# Altium PCB Encoder_v1.PcbDoc
Units mm, origin at the board's own origin, x right, y up, seen from the top; angles counter-clockwise.
Board outline 54 x 36 mm, 2 copper layers (Top Layer, Bottom Layer), stack 1.57 mm thick; 24 components, 32 nets, 128 pads, 67 vias.
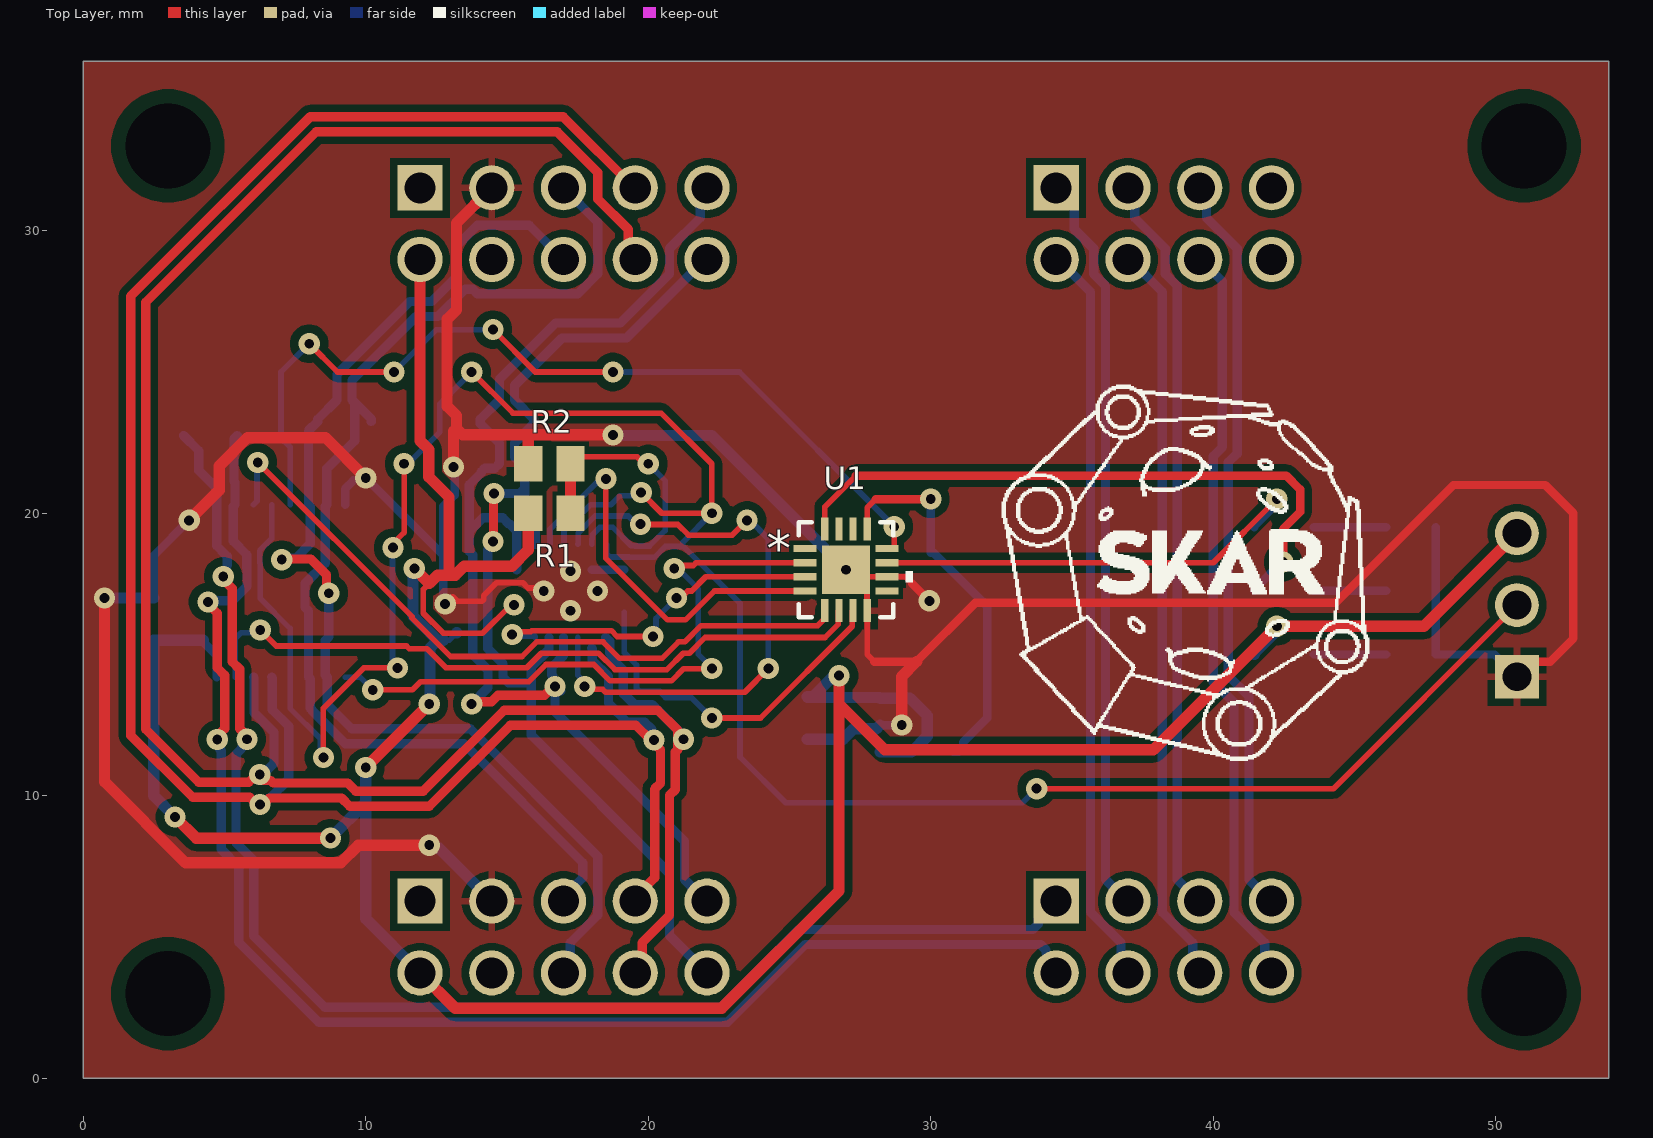
[diagram p0: Top Layer view]
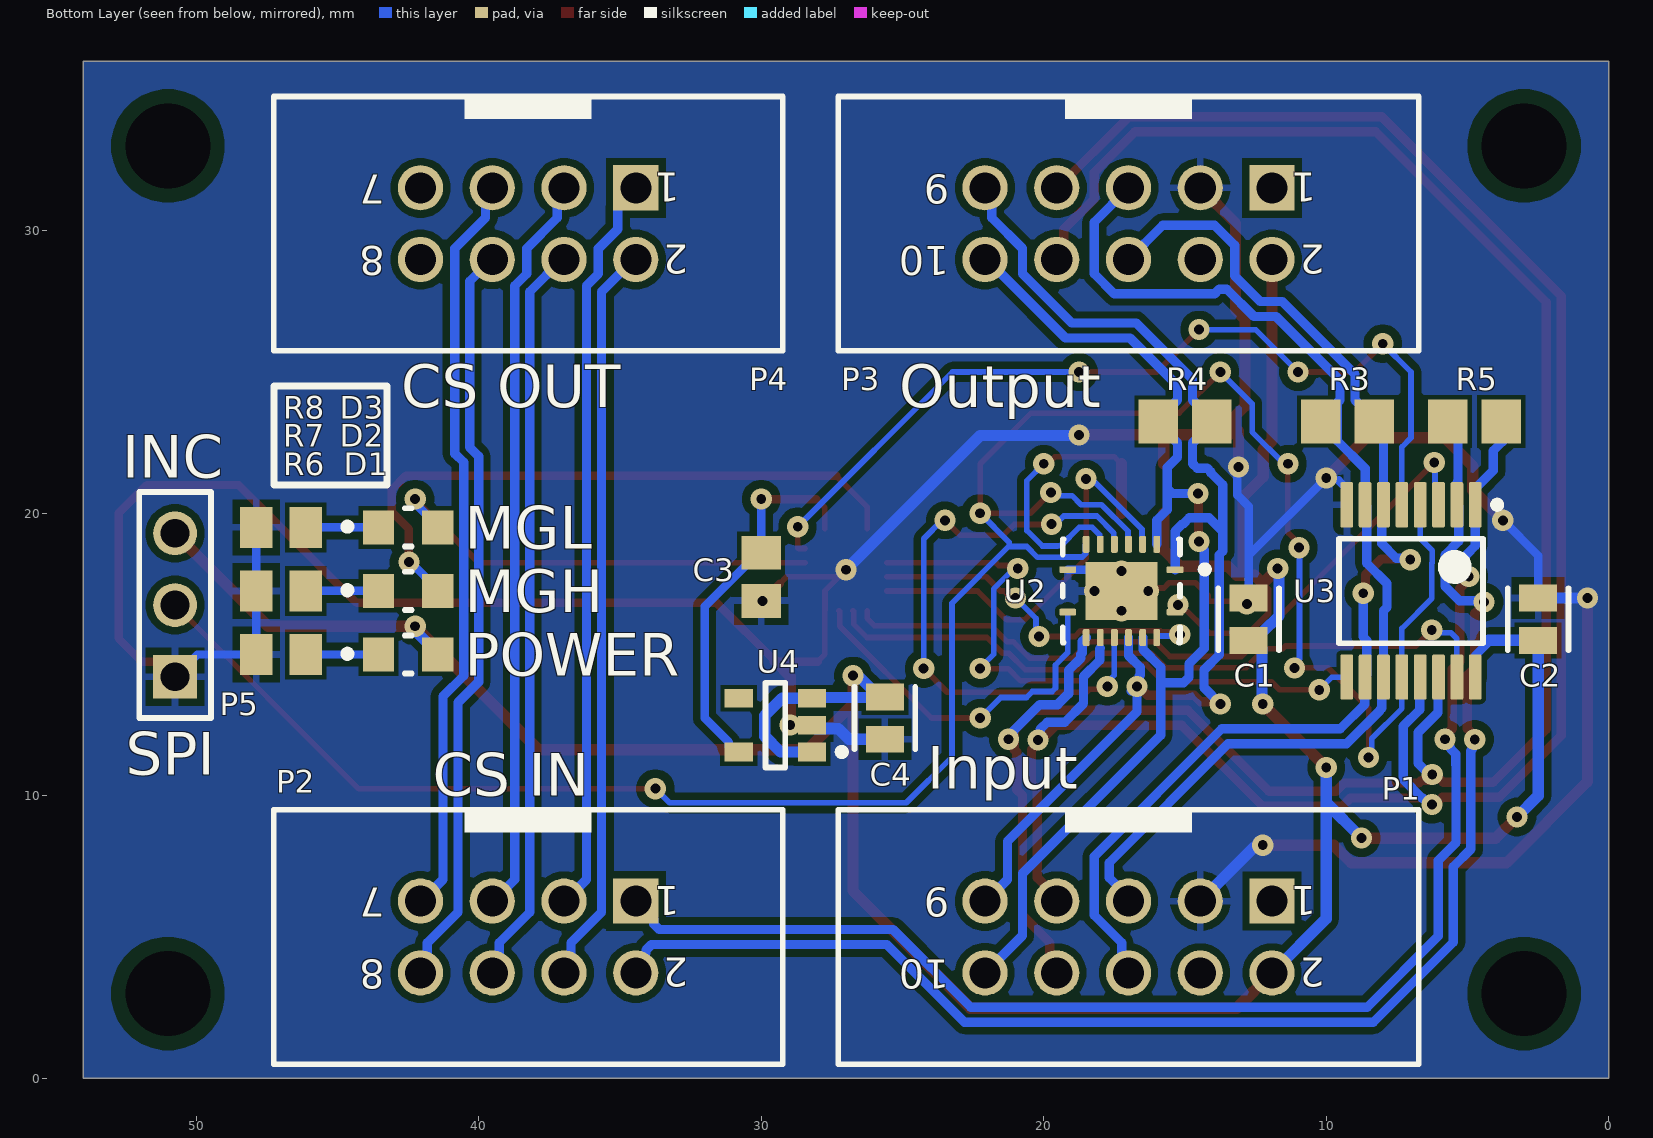
[diagram p1: Bottom Layer view, seen from below]
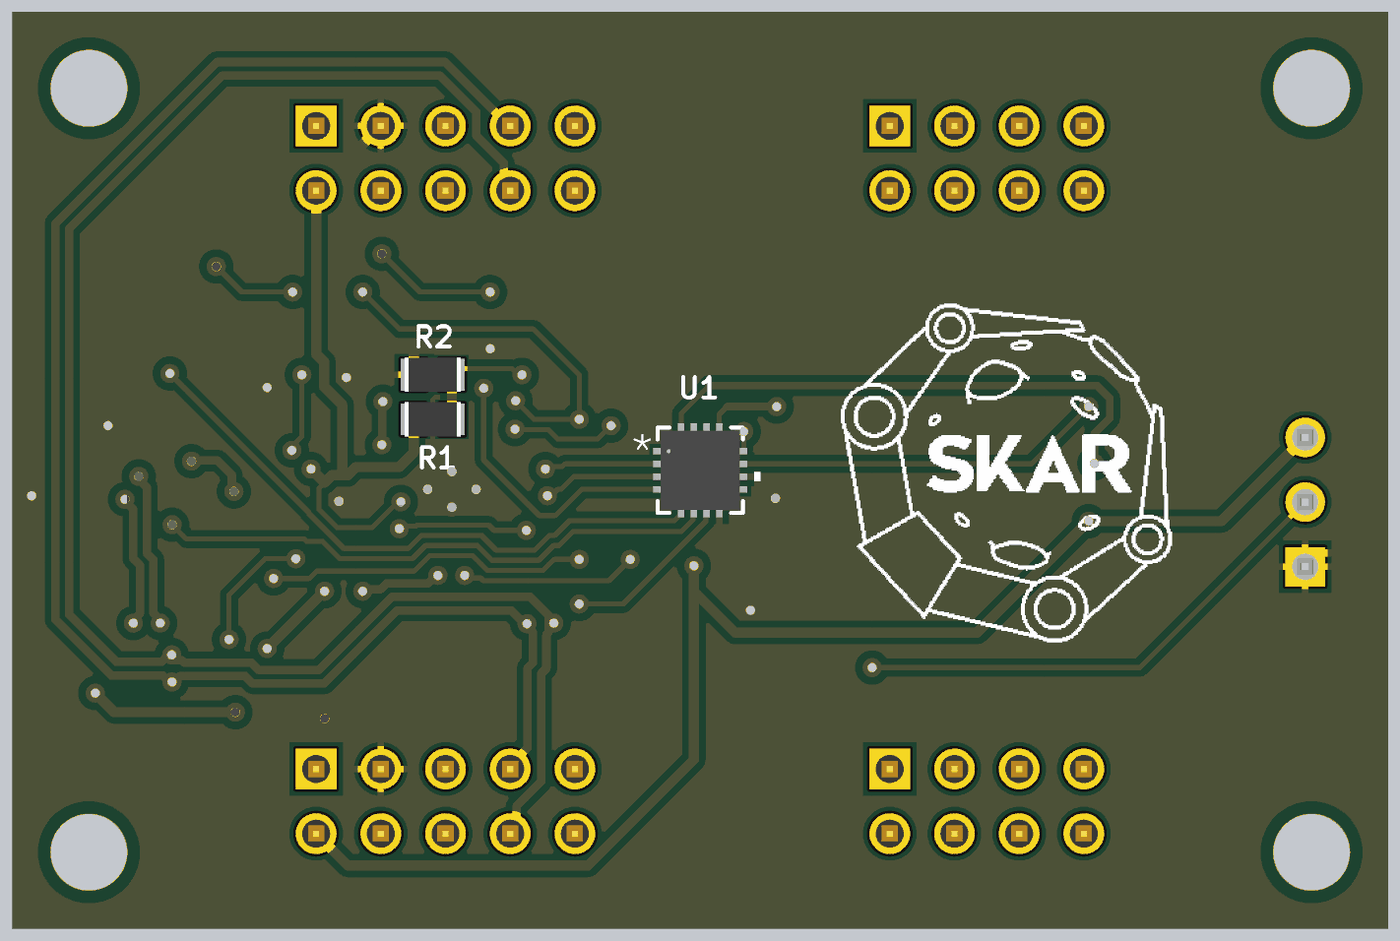
[diagram p2: 3D render of the assembled board from above, using the file's embedded part models]
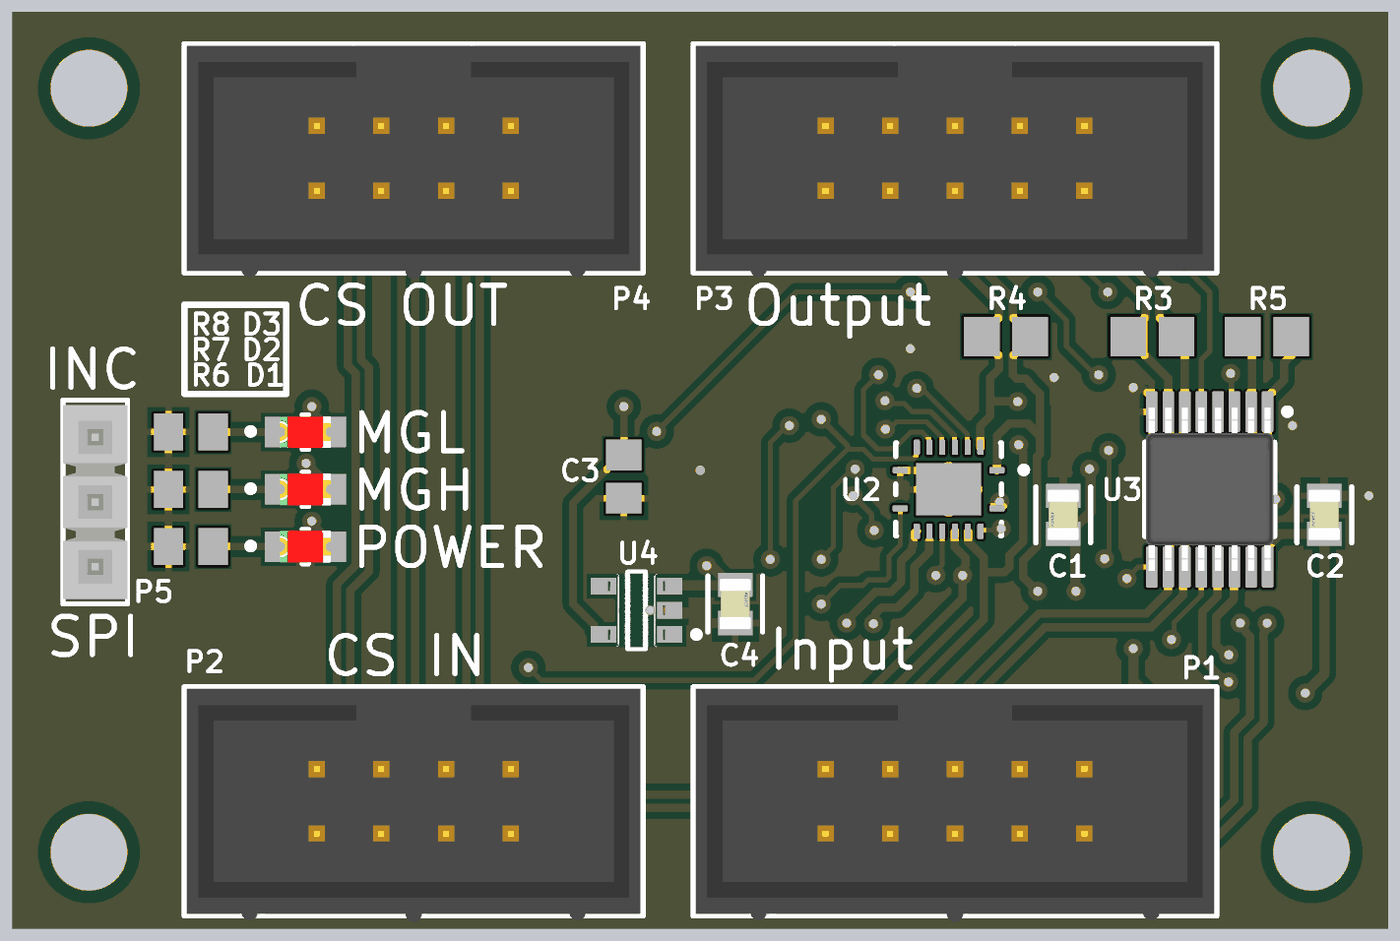
[diagram p3: 3D render of the assembled board from below, using the file's embedded part models]

## Layer stack, top to bottom
Top Solder: solder mask 0.01, Solder Resist, Dk 3.5
Top Layer: signal copper 0.035
Dielectric 1: dielectric 1.5, FR-4, Dk 4.5
Bottom Layer: signal copper 0.035
Bottom Solder: solder mask 0.01, Solder Resist, Dk 3.5

## Board outline
0,0 0,36 54,36 54,0

## Design rules (kind name [scope] priority, off if disabled: settings)
Clearance [All] p1: gap=0.254 ignorepadtopadclearanceinfootprint=FALSE except(0.15: SMDPad-SMDPad SMDPad-THPad SMDPad-Via SMDPad-Fill SMDPad-Poly SMDPad-Region SMDPad-Text; 0.2: Arc-Arc Arc-Track Arc-SMDPad Arc-THPad Track-Track Track-SMDPad Track-THPad; 0.5: Arc-Hole Track-Hole SMDPad-Hole THPad-Hole Via-Hole Fill-Hole Poly-Hole Region-Hole Text-Hole)
ComponentClearance [All] p1: gap=0.1 collisioncheckmode=3 verticalgap=0.1 showdistances=FALSE
DiffPairsRouting [All] p1: maxlimit=0.254 minlimit=0.2 mostfreqgap=0.2 toplayer_minwidth=0.33 toplayer_maxwidth=0.33 toplayer_prefwidth=0.33 bottomlayer_minwidth=0.33 bottomlayer_maxwidth=0.33 bottomlayer_prefwidth=0.33 maxuncoupledlength=12.7
HoleSize [All] p1: absolutevalues=TRUE maxlimit=4 minlimit=0.025 maxpercent=80.000 minpercent=20.000
MinimumSolderMaskSliver [All] p1: minsoldermaskwidth=0.2
PolygonConnect [All] p1: thpad.connectstyle=Relief thpad.reliefconductorwidth=0.254 thpad.reliefentries=4 thpad.polygonreliefangle="90 Angle" thpad.airgapwidth=0.254 smdpad.connectstyle=Relief smdpad.reliefconductorwidth=0.254 smdpad.reliefentries=4 smdpad.polygonreliefangle="90 Angle" smdpad.airgapwidth=0.254 via.connectstyle=Direct via.reliefconductorwidth=0.254 via.reliefentries=4 via.polygonreliefangle="90 Angle" via.airgapwidth=0.254
RoutingVias [All] p1: holewidth=0.35 width=0.75 viastyle="Through Hole" minholewidth=0.2 minwidth=0.5 maxholewidth=0.7 maxwidth=1
SMDNeckDown [All] p1: percent=90.000
SilkToSilkClearance [All] p1: silktosilkclearance=0.2
SilkToSolderMaskClearance [IsPad] p1: minsilkscreentomaskgap=0.2 clearancetoexposedcopper=TRUE
SolderMaskExpansion [All] p1: expansion=0.102 istentingtop=FALSE useseparateexpansions=TRUE expansionbottom=0.102 istentingbottom=FALSE
Width [All] p1: maxlimit=0.4 minlimit=0.2 preferedwidth=0.3
Width Width_Differential [InNetClass('SIGNAL')] p2: maxlimit=0.381 minlimit=0.135 preferedwidth=0.331 impedanceprofiledriven=TRUE impedanceprofileid={12B866CA-FE4E-4F91-8C1C-2824152DAA23} impedanceprofilevalue=120.000000 minimp=50.000000 maximp=50.000000 favimp=50.000000
Width Width_Power [InNetClass('POWER')] p3: maxlimit=1 minlimit=0.25 preferedwidth=0.5
24 further rules are at their usual default settings.

## Classes and differential pairs
differential pair CS3: +CS3_P -CS3_N
differential pair CS2: +CS2_P -CS2_N
differential pair CS1: +CS1_P -CS1_N
differential pair Z/MOSI: +Z/MOSI_P -Z/MOSI_N
differential pair CS: +CS_P -CS_N
differential pair B/MISO: +B/MISO_P -B/MISO_N
differential pair A/SCLK: +A/SCLK_P -A/SCLK_N

## Components (designator, comment, footprint, x,y, rotation, side; value= is the part's Value field where it differs from the comment)
C1 "C0805C104K5RACTU" FP-C0805C-DN-MFG 12.75,16.25 r90 bottom value="0.10 μF"
C2 "C0805C104K5RACTU" FP-C0805C-DN-MFG 2.5,16.25 r90 bottom value="0.10 μF"
C3 "GRM216R61E105KA12D" CAPC2013X70X45NL10T25 30,17.75 r90 bottom
C4 "C0805C104K5RACTU" FP-C0805C-DN-MFG 25.625,12.75 r270 bottom value="0.10 μF"
D1 "150080SS75000" FP-150080SS75000-MFG 42.5,15 r180 bottom
D2 "150080SS75000" FP-150080SS75000-MFG 42.5,17.25 r180 bottom
D3 "150080SS75000" FP-150080SS75000-MFG 42.5,19.5 r180 bottom
P1 "61201021621" 61201021621 17,5 r0 bottom
P2 "61200821621" 61200821621 38.25,5 r0 bottom
P3 "61201021621" 61201021621 17,30.25 r0 bottom
P4 "61200821621" 61200821621 38.25,30.25 r0 bottom
P5 "TSW-103-07-T-S" SMTC-TSW-103-07-X-S 50.75,14.21 r90 bottom
R1 "ERA-6AEB103V" RESC2013X60X40LL20T25_A 16.5,20 r180 top
R2 "ERA-6AEB103V" RESC2013X60X40LL20T25_A 16.5,21.75 r0 top
R3 "ERA6AEB121V" RESC2013X60X40ML20T25 9.25,23.25 r180 bottom
R4 "ERA6AEB121V" RESC2013X60X40ML20T25 15,23.25 r0 bottom
R5 "ERA6AEB121V" RESC2013X60X40ML20T25 4.75,23.25 r0 bottom
R6 "ERJ-6ENF4701V" RESC2013X70X40NL20T20 47,15 r0 bottom
R7 "ERJ-6ENF4701V" RESC2013X70X40NL20T20 47,17.25 r0 bottom
R8 "ERJ-6ENF4701V" RESC2013X70X40NL20T20 47,19.5 r0 bottom
U1 "MA732GQ-Z" QFN-16_MA732 27,18 r0 top locked
U2 "SN65C1168ERGYR" RGY0016A_V 17.25,17.25 r270 bottom locked
U3 "SN65C1167EPWR" PW0016A_M 7,17.25 r270 bottom
U4 "MIC5504-3.3YM5-TR" FP-SOT23-5LD-PL-1-MFG 29.5,12.5 r0 bottom

## Footprints (in the part's own frame and the unit in brackets; to place one, negate y for a bottom-side part, rotate by r counter-clockwise, add the part's x,y. Pads: shape width x height; smd on the part's side, far side on the other; paste and mask are expansions set on the pad)
61200821621 [mm] "8 pins, straight, gold plating"
  rect 1.6x1.6 hole 1.1: 1(-3.81,-1.27)
  round 1.6 hole 1.1: 2(-3.81,1.27) 3(-1.27,-1.27) 4(-1.27,1.27) 5(1.27,-1.27) 6(1.27,1.27) 7(3.81,-1.27) 8(3.81,1.27)
  silkscreen extent -9.01,-4.5 9.01,4.5, body extent -8.91,-4.42 8.91,4.75, height 9.13
61201021621 [mm] "10 pins, straight, gold plating"
  rect 1.6x1.6 hole 1.1: 1(-5.08,-1.27)
  round 1.6 hole 1.1: 2(-5.08,1.27) 3(-2.54,-1.27) 4(-2.54,1.27) 5(0,-1.27) 6(0,1.27) 7(2.54,-1.27) 8(2.54,1.27) 9(5.08,-1.27) 10(5.08,1.27)
  silkscreen extent -10.28,-4.5 10.28,4.5, body extent -10.18,-4.42 10.18,4.75, height 9.13
CAPC2013X70X45NL10T25 [mm] "Chip Capacitor, 2-Leads, Body 2.00x1.25mm, IPC Medium Density"
  rect 1.2x1.4 smd: 1(-0.85,0) 2(0.85,0)
  body extent -1.05,-0.67 1.05,0.67, height 0.7
FP-150080SS75000-MFG [mm]
  rect 1.1x1.2 smd paste+0 mask+0: 1(-1.05,0) 2(1.05,0)
  silkscreen extent -2.28,-0.67 0.13,0.67, body extent -1,-0.63 1,0.63, height 0.8
FP-C0805C-DN-MFG [mm]
  rect 0.95x1.35 smd paste+0 mask+0: 1(-0.75,0) 2(0.75,0)
  silkscreen extent -1.1,-1.07 1.1,1.07, body extent -1,-0.63 1,0.63, height 0.88
FP-SOT23-5LD-PL-1-MFG [mm]
  rect 1x0.66 smd paste+0 mask+0: 1(-1.3,0.95) 2(-1.3,0) 3(-1.3,-0.95) 4(1.3,-0.95) 5(1.3,0.95)
  silkscreen extent -2.47,-1.5 0.35,1.5, body extent -1.4,-1.45 1.4,1.45, height 1.45
PW0016A_M [mm] "SOP, 16-Leads, Body 5.1x4.5mm, Pitch 0.65mm, IPC Low Density"
  rrect22% 1.6x0.45 smd: 1(-3.05,2.275) 2(-3.05,1.625) 3(-3.05,0.975) 4(-3.05,0.325) 5(-3.05,-0.325) 6(-3.05,-0.975) 7(-3.05,-1.625) 8(-3.05,-2.275) 9(3.05,-2.275) 10(3.05,-1.625) 11(3.05,-0.975) 12(3.05,-0.325) 13(3.05,0.325) 14(3.05,0.975) 15(3.05,1.625) 16(3.05,2.275)
  silkscreen extent -3.17,-2.55 1.85,3.17, body extent -3.21,-2.5 3.21,2.5, height 1
QFN-16_MA732 [mil]
  rect 32x10 smd paste+0 mask+0: 1(-57,29.53) 2(-57,9.84) 3(-57,-9.84) 4(-57,-29.53) 9(57,-29.53) 10(57,-9.84) 11(57,9.84) 12(57,29.53)
  rect 10x32 smd paste+0 mask+0: 5(-29.53,-57) 6(-9.84,-57) 7(9.84,-57) 8(29.53,-57) 13(29.53,57) 14(9.84,57) 15(-9.84,57) 16(-29.53,57)
  rect 67x67 smd paste+0 mask+0: 17(0,0)
  silkscreen extent -66,-66 93,66, body extent -61,-61 61,61, height 37
RESC2013X60X40LL20T25_A [mm] "Chip Resistor, 2-Leads, Body 2.20x1.35mm, IPC High Density"
  rect 1x1.25 smd: 1(-0.75,0) 2(0.75,0)
  body extent -1.1,-0.67 1.1,0.67, height 0.6
RESC2013X60X40ML20T25 [mm] "Chip Resistor, 2-Leads, Body 2.00x1.25mm, IPC Low Density"
  rect 1.4x1.55 smd: 1(-0.95,0) 2(0.95,0)
  body extent -1.1,-0.72 1.1,0.72, height 0.6
RESC2013X70X40NL20T20 [mm] "Chip Resistor, 2-Leads, Body 2.2x1.35mm, IPC Medium Density"
  rect 1.15x1.45 smd: 1(-0.875,0) 2(0.875,0)
  body extent -1.1,-0.72 1.1,0.72, height 0.7
RGY0016A_V [mm] "QFN, 16-Leads, Body 4x3.5mm, Thermal Pad 2.55x2.05mm, TI Recommend"
  rrect42% 0.24x0.6 smd: 1(-0.75,1.9) 8(-0.75,-1.9) 9(0.75,-1.9) 16(0.75,1.9)
  rrect42% 0.6x0.24 smd: 2(-1.65,1.25) 3(-1.65,0.75) 4(-1.65,0.25) 5(-1.65,-0.25) 6(-1.65,-0.75) 7(-1.65,-1.25) 10(1.65,-1.25) 11(1.65,-0.75) 12(1.65,-0.25) 13(1.65,0.25) 14(1.65,0.75) 15(1.65,1.25)
  rect 2.05x2.55 smd: 17(0,0)
  silkscreen extent -1.83,-2.07 1.83,3.07, body extent -1.75,-2 1.75,2, height 1
SMTC-TSW-103-07-X-S [mm] ".025 SQ Post Terminal Strip Assembly, 1x3 Pins, Vertical, 2.54mm Pitch, Male"
  rect 1.55x1.55 hole 1.02: 1(0,0)
  round 1.55 hole 1.02: 2(2.54,0) 3(5.08,0)
  silkscreen extent -1.46,-1.27 6.54,1.27, body extent -1.27,-1.27 6.35,1.27, height 8.38

## Part data
C1 C2 C4: library part CMP-2007-00279-2, "CAP CER 0.1UF 50V X7R 0805", Capacitance="0.10 μF", Manufacturer=KEMET, Package=C0805C-DN, Temperature="-55°C to +125°C", Temperature Characteristic=X7R, Temperature Coefficient=30ppm/°C, Temperature Range High=+125°C, Temperature Range Low=-55°C, Tolerance=0.1, Voltage Rating="50 V", Automotive=No, Category=Cap, ComponentLink2Description=Datasheet, ComponentLink2URL=https://content.kemet.com/datasheets/KEM_C1003_C0G_SMD.pdf, Device Class L1="Passive Components", Device Class L2=Capacitors, Device Class L3="Ceramic Capacitors", Digikey Description="CAP CER 0.1UF 50V X7R 0805", Height=0.88mm, Ipc Land Pattern Name=CAPC200125X78, Lead Free=Yes, Manufacturer Part Number=C0805C104K5RACTU, Material=Ceramic, Mouser Description="Cap Ceramic 0.1uF 50V X7R 10% SMD 2.0 x 1.2 mm 125 C Paper T/R", Octopart=https://octopart.com/c0805c104k5ractu-kemet-143926, RoHS=TRUE
C3: library part CMP-2007-00957-1, Manufacturer=Murata, Part Number=GRM216R61E105KA12D
D1 D2 D3: library part CMP-1426-00010-2, "LED RED CLEAR 0805 SMD", Case Code (Imperial)=0805, Case Code (Metric)=2012, Color=Red, Forward Current=30mA, Forward Voltage=1.9V, Lens Color=Colorless, Max Operating Temperature=85°C, Min Operating Temperature=-40°C, Package Quantity=1, Test Current=20mA, Case/Package=0805, Dominant Wavelength=630nm, Height=0.8mm, Length=2mm, Lens Size=1.25mm, Lens Style=Clear, Lens Transparency=Clear, Luminous Intensity=60mcd, Mount="Surface Mount", Packaging="Cut Tape", RoHS Compliant=Yes, Series=WL-SMCW, Viewing Angle=140°, Wavelength=630nm, Width=1.25mm
P1 P3: library part CMP-1502-00007-1, "Male Box Header WR-BHD, THT, Vertical, pitch 2.54 mm, 10 pins", Contact Resistance=20mOhm, Manufacturer="Wurth Elektronik", Operating Temperature=-40to125degC, Withstanding Voltage=500VAC, Working Voltage=250VAC, Datasheet URL=https://katalog.we-online.de/em/datasheet/6120xx21621.pdf, Gender=Male, Manufacturer URL=http://www.we-online.de, Mounting Technology=THT, Orientation=Vertical, Package Reference=61201021621, Packaging=Tray, Part Number=61201021621, Pin Number=10, Pitch=2.54mm, Published Date=August2018, Publisher=WurthElektronik
P2 P4: library part CMP-1502-00006-1, "Male Box Header WR-BHD, THT, Vertical, pitch 2.54 mm, 8 pins", Contact Resistance=20mOhm, Manufacturer="Wurth Elektronik", Operating Temperature=-40to125degC, Withstanding Voltage=500VAC, Working Voltage=250VAC, Datasheet URL=https://katalog.we-online.de/em/datasheet/6120xx21621.pdf, Gender=Male, Manufacturer URL=http://www.we-online.de, Mounting Technology=THT, Orientation=Vertical, Package Reference=61200821621, Packaging=Tray, Part Number=61200821621, Pin Number=8, Pitch=2.54mm, Published Date=August2018, Publisher=WurthElektronik
P5: library part CMP-1024-00332-1, "0.025\" SQ Post Header, Through-hole, Vertical, -55 to 105 degC, 2.54 mm Pitch, 3-Pin, Male, RoHS", Manufacturer=Samtec, Temperature Range="-55 to 105 degC", ComponentLink1Description="Manufacturer URL", ComponentLink1URL=http://www.samtec.com, ComponentLink2Description=Datasheet, ComponentLink2URL=http://www.samtec.com/documents/webfiles/pdf/TSW_TH.PDF, ComponentLink3Description="Package Specification", ComponentLink3URL=http://www.samtec.com/documents/webfiles/cpdf/TSW-XXX-XX-XXX-X-XX-XXX-MKT.pdf, DatasheetVersion=F-214, Mounting Technology=Through-hole, Orientation=Vertical, PackageDescription=".025[0.64] SQ. Post Terminal Strip Assembly", PackageReference=TSW-103-07-X-S, PackageVersion="DM, 8/1988", PartNumber=TSW-103-07-T-S, Pitch="2.54 mm", RoHS=True
R1 R2: library part CMP-2001-00582-2, "Metal Film Chip Resistor, High Reliability Type, 0.125 W, +/- 0.1%, -55 to 155 degC, 0805 (2012 Metric), RoHS, Tape and Reel", Case Code - in=0805, Case Code - mm=2012, Manufacturer=Panasonic, Operating Temperature Range=-55Cto+155C, Package / Case=0805(2012metric), Package Description="2-Pin Surface Mount Device, Body 2 x 1.25 mm", Power Rating=125mW(1/8W), Resistance=10kOhms, Temperature Coefficient=25PPM/C, Tolerance=0.1%, Voltage Rating=100V, Brand=Panasonic, Datasheet URL=https://industrial.panasonic.com/cdbs/www-data/pdf/RDM0000/AOA0000C307.pdf, Datasheet Version=02/2016, Factory Pack Quantity=5000, Height=0.5mm, Length=2mm, Manufacturer URL=http://www.panasonic.com/, Mounting Technology=SurfaceMount, Package Reference=0805, Packaging=Reel, Product=ThinFilmResistorsSMD, Product Category=ThinFilmResistors-SMD, RoHS=Details, Series=ERA-6A, Termination Style=SMD/SMT, Type=MetalFilmChipResistors, Width=1.25mm
R3 R4 R5: library part CMP-2001-00588-1, Manufacturer=Panasonic, Part Number=ERA6AEB121V
R6 R7 R8: library part CMP-2001-00550-5, "Chip Resistor, 4.7 KOhm, +/- 1%, 0.125 W, -55 to 155 degC, 0805 (2012 Metric), RoHS, Tape and Reel", Manufacturer=Panasonic, Max Operating Temperature="155 degC", Min Operating Temperature="-55 degC", Package Quantity=5000, Voltage Rating="150 V", ComponentLink1Description="Manufacturer URL", ComponentLink1URL=http://www.panasonic.com/, ComponentLink2Description=Datasheet, ComponentLink2URL=http://industrial.panasonic.com/cdbs/www-data/pdf/RDA0000/AOA0000C86.pdf, DatasheetVersion=04/2015, Height="0.6 mm", Length="2 mm", Mount="Surface Mount", Mounting Technology="Surface Mount", PackageDescription="2-Pin Surface Mount Device, Body 2 x 1.25 mm", PackageReference=0805, Packaging="Tape and Reel", Pins=2, REACH SVHC=Yes, RoHSCompliant=true
U1: "No Description Available", Mfr_Name="Monolithic Power Systems", Copyright="Copyright (C) 2023 Ultra Librarian. All rights reserved.", Manufacturer_Part_Number=MA732GQ-Z, RefDes=RefDes, Type=DEV
U2: library part CMP-0310-00131-3, "None", Case/Package="VQFN EP", Max Operating Temperature=85°C, Max Supply Voltage=5.5V, Min Operating Temperature=-40°C, Min Supply Voltage=4.5V, Nominal Supply Current=9mA, Operating Supply Voltage=5V, Output Current=20uA, Output Voltage=3.5V, Package Quantity=1, Data Rate=10Mbps, Lead Free="Lead Free", Logic Function=Transceiver, Number of Drivers=2, Number of Pins=16, Number of Receivers=2, Number of Transceivers=1, Number of Transmitters=2, Operating Supply Current=9mA, Packaging="Tape and Reel", Propagation Delay=8ns, Radiation Hardening=No, RoHS Compliant=Yes, Series=-, Supply Current=9mA, Weight=0.001312oz
U3: library part CMP-0310-00539-2, "Dual Differential Driver and Receiver with +/-15-kV IEC ESD Protection, 2 TX / 2 RX, 5V, -40 to 85 degC, 16-Pin TSSOP(PW), Green (RoHS & no Sb/Br)", Drivers Per Package=2, Manufacturer="Texas Instruments", Rating=Catalog, Supply Voltage(s)(V)=5, # of TX/RX="2 TX / 2 RX", Code_JEDEC=MO-153, ComponentLink1Description=Datasheet, ComponentLink1URL=http://www.ti.com/general/docs/lit/getliterature.tsp?genericPartNumber=SN65C1167E&fileType=pdf, ComponentLink2Description="Package Specification", ComponentLink2URL=http://www.ti.com/lit/ml/mpds361/mpds361.pdf, DatasheetVersion=SLLS740A, Eco-Plan="Green (RoHS & no Sb/Br)", ESD(kV)=15, ICC(Max)(mA)=9, Mounting Technology="Surface Mount", PackageDescription="16-Pin Plastic Thin Small Outline Package 5 x 4.4 mm Body ,0.65 mm Pitch", PackageReference=PW0016A, PackageVersion="revG, Feb-2011", PartNumber=SN65C1167EPWR, Receivers Per Package=2, SubFamily=RS-422
U4: library part CMP-2000-07604-2, "IC REG LINEAR 3.3V 300MA SOT23-5", Case/Package=SOT-23-5, Dropout Voltage=380mV, Max Input Voltage=5.5V, Max Operating Temperature=125°C, Max Output Current=300mA, Min Input Voltage=2.5V, Min Operating Temperature=-40°C, Nominal Output Voltage=3.3V, Operating Supply Current=42uA, Power Supply Rejection Ratio (PSRR)=60dB, Quiescent Current=38uA, Accuracy=3%, Height=1.1mm, Length=2.9mm, Mount="Surface Mount", Number of Outputs=1, Number of Pins=5, Output Current=300mA, Output Type=Fixed, Output Voltage=3.3V, Packaging="Tape and Reel", REACH SVHC="No SVHC", Width=1.6mm

## Free pads (board coordinates)
  round 0 hole 3: 2(51,33) 3(3,33) 4(51,3) 5(3,3)

## Via types
v1: diameter 0.75, hole 0.35, Top Layer to Bottom Layer, tented both sides, 63 vias
v2: diameter 0.75, hole 0.35, Top Layer to Bottom Layer, tented top, 4 vias

## Nets (pads, with @x,y where several pads share a name; then routed paths per layer and width w, separated by ;. In a path a pad name is that pad's centre, name@x,y a point inside that pad or via, vN(x,y) a via of type N, cw(c..) or ccw(c..) an arc to the next point about the centre after c; other vN are vias at no path point)
+3.3: C3.2 U1.13 U4.5 | length 13.6
  Top Layer w0.2: U1.13 27.75,20.199 28.051,20.5
  Top Layer w0.3: 28.051,20.5 v1(30,20.5)
  Bottom Layer w0.3: v1(30,20.5) C3.2 30.1,18.6 32,16.7 32,12.75 31.15,11.9 31.15,11.73 30.97,11.55 U4.5
+5: C1.1 C2.1 C4.1 D1.2 P1.2 P3.2 P5.3 R1.2 U2.16 U3.16 U4.1 U4.3 | length 120.3
  Top Layer w0.2: 12.25,17.519 12.037,17.306 12.037,16.462 12.749,15.75 14.133,15.75 15.141,16.758 v1(15.25,16.758)
  Top Layer w0.4: v1(3.25,9.25) 4,8.5 v1(8.75,8.5) ; v1(10,11) v1(12.25,13.25) ; v1(11.72,18.049) 12.25,17.519 12.538,17.806 12.944,17.806 ; P1.2@11.92,3.73 13.17,2.48 22.598,2.48 26.75,6.632 26.75,13.25 ; P3.2 11.92,22.567 12.233,22.254 12.233,21.28 12.944,20.569 12.944,17.806 ; R1.2 15.75,18.697 15.179,18.126 14.863,18.126 13.483,18.125 13.164,17.806 12.944,17.806 ; v1(26.75,14.25) 26.75,13.25 ; P5.3 47.46,16 v1(42.25,16) 37.875,11.625 28.375,11.625 26.75,13.25
  Bottom Layer w0.2: C1.1@12.95,15.5 C1.1@13.225,15.775 ; v1@15.208,16.717 15.208,16.642 U2.16 15.25,16.6 v1(15.25,16.758)
  Bottom Layer w0.3: 4.25,15.5 4.25,15.442 4.725,14.967 U3.16
  Bottom Layer w0.4: v1(3.25,9.25) 2.5,10 C2.1 4.25,15.5 ; v1(8.75,8.5) 10,9.75 ; v1(10,11) 10,9.75 ; v1(11.72,18.049) 11.675,18.004 11.675,16.359 11.958,16.076 11.974,16.076 C1.1@12.55,15.5 ; P1.2@11.92,3.73 10,5.65 10,9.75 ; v1(12.25,13.25) 12.275,13.275 12.275,15.225 C1.1@12.55,15.5 ; C1.1 C1.1@12.55,15.5 ; v1(26.75,14.25) 26.683,14.183 26.508,14.183 25.825,13.5 C4.1 25.65,13.475 28.175,13.475 U4.3 29.261,13.45 29.875,12.836 29.875,12.108 29.317,11.55 U4.1 ; D1.2 41.45,15.05 42.183,15.783 42.183,15.933 v1(42.25,16)
A/SCLK_N: P1.5 P3.5 R3.1 U3.7 U3.11 | length 40.9
  Bottom Layer w0.33: R3.1 10.2,23.325 R3.1@9.607,23.918 ; P1.5@17,6.27 17,6.413 17.685,7.098 17.685,7.633 13.477,11.84 9.281,11.84 8.102,13.019 8.102,13.027 8.035,13.094 8.035,14.14 U3.11 7.975,16.552 7.851,16.675 7.851,17.515 8.565,18.229 8.565,19.378 8.565,20.24 U3.7 8.625,21.584 9.607,22.566 R3.1@9.607,23.918 ; P3.5 18.215,30.305 18.215,28.477 17.503,27.765 13.957,27.765 13.794,27.928 13.52,27.928 12.557,26.965 11.777,26.965 9.515,24.703 9.515,24.01 R3.1@9.607,23.918
A/SCLK_P: P1.6 P3.6 R3.2 U3.6 U3.10 | length 41.9
  Top Layer w0.33: v1(7.027,18.356) 7.033,18.363 7.345,18.363 7.362,18.38 8.058,18.38 8.611,17.827 8.611,17.247 v1(8.691,17.167)
  Bottom Layer w0.33: v1(7.027,18.356) 7.081,18.41 7.519,18.41 8.035,18.926 8.035,20.24 U3.6 7.975,22.925 R3.2 ; R3.2@8.3,23.325 8.985,24.01 8.985,24.923 11.557,27.495 12.338,27.495 13.245,28.403 13.245,29.483 13.957,30.195 15.785,30.195 P3.6 ; v1(8.691,17.167) 8.691,15.623 8.565,15.497 8.565,15.122 8.565,14.26 8.632,14.193 8.632,13.239 9.5,12.37 13.697,12.37 18.215,7.852 18.215,5.767 17.243,4.795 17.243,3.973 P1.6@17,3.73
B/MISO_N: P1.7 P3.7 U2.11 U3.13 | length 74.2
  Top Layer w0.33: v1(6.262,9.688) 6.149,9.688 5.892,9.945 3.873,9.945 1.686,12.131 1.686,27.686 8.03,34.03 16.994,34.03 19.504,31.52 P3.7 ; v1@6.364,9.7 6.583,9.92 9.142,9.92 9.432,9.63 12.25,9.63 15.12,12.5 19.562,12.5 20.086,11.976 v1(20.2,11.976) 20.2,11.862 20.431,11.631 20.431,10.442 20.225,10.235 20.225,7.098 19.54,6.413 P1.7@19.54,6.27
  Bottom Layer w0.33: v1(6.262,9.688) 6.351,9.688 6.573,9.91 6.598,9.91 7.28,10.592 7.28,12.458 6.692,13.046 6.692,14.183 U3.13 ; 18,15.223 18.015,15.208 18.015,14.793 18.59,14.218 18.59,13.269 19.253,12.606 19.873,12.606 20.12,12.36 20.12,12.056 v1(20.2,11.976) ; P3.7@19.401,31.52 P3.7
B/MISO_P: P1.8 P3.8 U2.10 U3.14 | length 78.1
  Top Layer w0.33: v1(6.25,10.75) 6.136,10.75 5.861,10.475 4.092,10.475 2.216,12.351 2.216,27.466 8.25,33.5 16.774,33.5 18.215,32.059 18.215,31.126 19.297,30.045 19.297,29.223 P3.8 ; v1@6.26,10.54 6.641,10.54 6.731,10.45 9.362,10.45 9.652,10.16 12.03,10.16 14.9,13.03 20.333,13.03 21.04,12.324 v1@21.04,12 ; P1.8@19.54,3.73 19.783,3.973 19.783,4.795 20.755,5.767 20.755,10.016 20.962,10.222 20.962,11.549 21.04,11.628 v1@21.04,12 ; v1(21.25,12) v1@21.04,12
  Bottom Layer w0.33: U3.14 6.042,14.183 6.042,12.946 6.75,12.238 6.75,11.153 6.347,10.75 v1(6.25,10.75) ; U2.10 18.635,15.465 18.635,15.05 18.685,15 18.685,14.873 19.12,14.438 19.12,13.616 19.51,13.226 20.138,13.226 21.04,12.324 21.25,12.114 v1(21.25,12) ; P3.8@19.297,29.223 P3.8
CS1_N: P2.3 P4.1 | length 26.3
  Bottom Layer w0.33: P4.1 35.075,30.885 35.075,30.063 35.765,29.373 35.765,28.477 36.185,28.056 36.185,7.034 36.949,6.27 P2.3@36.98,6.27
CS1_P: P2.4 P4.2 | length 26.3
  Bottom Layer w0.33: P4.2 34.512,28.98 35.655,27.837 35.655,5.876 36.737,4.795 36.737,3.973 P2.4@36.98,3.73
CS2_N: P2.5 P4.3 | length 26.3
  Bottom Layer w0.33: P4.3 37.223,31.277 37.223,30.455 38.305,29.373 38.305,28.477 38.725,28.056 38.725,7.034 39.489,6.27 P2.5@39.52,6.27
CS2_P: P2.6 P4.4 | length 26.3
  Bottom Layer w0.33: P4.4 37.052,28.98 38.195,27.837 38.195,5.876 39.277,4.795 39.277,3.973 P2.6@39.52,3.73
CS3_N: P2.7 P4.5 | length 26.6
  Bottom Layer w0.33: P4.5 39.763,31.277 39.763,30.455 40.845,29.373 40.845,22.111 40.535,21.801 40.535,14.249 41.265,13.518 41.265,7.034 42.029,6.27 P2.7@42.06,6.27
CS3_P: P2.8 P4.6 | length 26.6
  Bottom Layer w0.33: P4.6 39.551,28.98 40.315,28.216 40.315,22.33 40.005,22.02 40.005,14.029 40.735,13.299 40.735,5.876 41.817,4.795 41.817,3.973 P2.8@42.06,3.73
CS_N: P2.1 R5.1 U3.1 | length 49.8
  Top Layer w0.33: v1(4.955,17.76) 4.955,17.652 5.274,17.334 5.274,16.889 5.274,14.748 5.535,14.486 5.535,12.379 5.8,12.114 v1(5.8,12)
  Bottom Layer w0.33: R5.1@3.55,22.75 4.085,22.215 4.085,21.515 4.725,20.875 4.725,18.845 5.011,18.559 5.092,18.478 5.092,18.281 5.092,18.163 ; v1(5.8,12) 5.8,11.886 5.585,11.671 5.585,11.648 5.415,11.479 5.415,11.104 5.41,11.098 5.41,8.332 6.034,7.708 6.034,5.034 8.552,2.515 22.583,2.515 25.334,5.265 33.612,5.265 33.805,5.459 33.805,5.635 P2.1@34.44,6.27
CS_P: P2.2 R5.2 U3.2 | length 51.9
  Top Layer w0.33: v1(4.414,16.859) 4.414,16.785 4.743,16.456 4.743,14.528 5.005,14.267 5.005,12.37 4.745,12.11 v1(4.745,11.996)
  Bottom Layer w0.33: v1(4.414,16.859) 4.456,16.901 5.284,16.901 5.795,17.412 5.795,18.047 5.785,18.057 5.785,18.535 5.315,19.005 5.315,20.24 U3.2 5.375,21.092 5.338,21.128 5.338,22.64 5.448,22.75 R5.2@5.45,22.75 ; v1(4.745,11.996) 4.825,11.916 4.825,11.657 4.885,11.597 4.885,11.323 4.88,11.318 4.88,8.113 5.503,7.489 5.503,4.814 8.333,1.985 22.803,1.985 25.553,4.735 33.887,4.735 34.08,4.541 34.08,4.434 34.44,4.074 P2.2@34.44,3.73
GND: C1.2 C2.2 C3.1 C4.2 P1.3 P3.3 P5.1 R2.1 R6.2 R7.2 R8.2 U1.8 U1.10 U1.17 U2.8 U2.17 U3.8 U4.2 | length 133.5
  Top Layer w0.2: v1(12.812,16.783) 13.077,17.048 13.243,16.883 14.109,16.883 14.175,16.949 14.175,17.085 14.629,17.539 15.271,17.539 15.565,17.539 15.749,17.355 16.195,17.355 v2@16.29,17.26 ; v1(27,18) U1.17@27.25,17.75 ; 28,14.75 27.75,15 U1.8 27.741,16.561 27.741,17.259 U1.17@27.25,17.75 ; 29.35,17.5 29.1,17.75 U1.17@27.25,17.75
  Top Layer w0.3: 28,14.75 29.5,14.75 31.575,16.825 44.325,16.825 48.5,21 51.75,21 52.75,20 52.75,15.568 51.932,14.75 51.29,14.75 P5.1 ; 29.35,17.5 v1(29.95,16.9)
  Top Layer w0.4: v1(0.75,17) 0.75,10.5 3.625,7.625 9.112,7.625 9.737,8.25 v1(12.25,8.25) ; v1(3.75,19.75) 4.816,20.816 4.816,21.676 5.816,22.675 8.575,22.675 v1(10,21.25) ; v1(13.108,21.642) 13.108,22.898 13.21,23 ; P3.3 13.21,30.27 13.21,27.198 12.875,26.863 12.875,23.791 13.21,23.456 13.21,23 ; R2.1 15.75,22.775 ; v1(18.755,22.769) 18.748,22.775 15.75,22.775 ; v1(28.974,12.5) 28.974,14.224 29.5,14.75 ; 13.21,23 13.435,22.775 15.75,22.775
  Bottom Layer w0.3: C2.2 2.5,18.5 v1(3.75,19.75) ; U3.8 9.275,20.875 9.564,21.164 ; v1(10,21.25) 12.75,18.5 ; C1.2 12.75,18.5 ; v1(13.108,21.642) 13.145,21.605 13.145,20.645 12.75,20.25 12.75,18.5 ; U2.17@18,18 U2.8 ; U4.2 v1(28.974,12.5) ; R8.2 R6.2 49.96,15 P5.1
  Bottom Layer w0.4: v1(0.75,17) C2.2 ; v1@12.547,8.183 P1.3@14.46,6.27 ; v1(18.755,22.769) 18.773,22.75 22.25,22.75 v1(27,18) ; C4.2 26.9,12 27.27,12.37 28.07,12.37 U4.2
  other v2: 17.25,16.55 16.3,17.25 18.2,17.25 17.25,17.95
MA732_A: U1.2 U3.9 | length 22.8
  Top Layer w0.2: v1(10.25,13.75) 11.654,13.75 11.945,14.041 15.775,14.041 16.379,14.645 18.071,14.645 18.652,14.065 20.823,14.065 21.259,14.5 v1(22.25,14.5) ; v1(20.921,18.047) 21.024,18.15 21.596,18.15 21.696,18.25 U1.2
  Bottom Layer w0.2: U3.9 9.8,14.2 v1(10.25,13.75) ; v1(20.921,18.047) 21.049,18.047 21.775,17.321 21.775,15.005 22.25,14.53 v1(22.25,14.5)
MA732_B: U1.6 U3.15 | length 25
  Top Layer w0.2: v1(6.267,15.863) 6.83,15.3 11.445,15.3 11.537,15.208 12.16,15.208 12.837,14.53 15.698,14.53 16.213,15.045 18.237,15.045 18.817,14.465 20.658,14.465 21.238,15.045 21.457,15.045 22.012,15.6 26.255,15.6 26.723,16.068 26.723,16.525 U1.6@26.75,16.552
  Bottom Layer w0.2: U3.15 5.375,15.556 5.592,15.774 6.179,15.774 v1(6.267,15.863)
MA732_CS: U1.5 U3.3 | length 25.8
  Top Layer w0.2: v1(6.178,21.8) 11.637,16.341 11.637,16.296 13.003,14.93 15.532,14.93 16.048,15.445 18.402,15.445 18.983,14.865 20.492,14.865 21.073,15.445 21.291,15.445 21.869,16.023 26,16.023 26.25,16.273 U1.5
  Bottom Layer w0.2: U3.3 6.15,20.425 6.15,21.772 v1(6.178,21.8)
MA732_MGH: D2.2 U1.16 | length 22.6
  Top Layer w0.2: U1.16 26.25,20.226 27.349,21.325
  Top Layer w0.3: 27.349,21.325 42.592,21.325 43.075,20.842 43.075,20.044 42.473,19.442 v1(42.473,18.272)
  Bottom Layer w0.3: D2.2 41.45,17.3 42.422,18.272 v1(42.473,18.272)
MA732_MGL: D3.2 U1.11 | length 16.1
  Top Layer w0.2: U1.11 40,18.25 v1(42.25,20.5)
  Bottom Layer w0.3: D3.2 41.45,19.55 42.164,20.264 42.164,20.414 v1(42.25,20.5)
MA732_MISO: U1.7 U2.9 | length 12.9
  Top Layer w0.2: v1(22.25,12.75) 23.971,12.75 27.223,16.002 27.223,16.525 U1.7
  Bottom Layer w0.2: U2.9 19.15,15.066 19.585,14.631 19.585,13.808 19.703,13.691 20.402,13.691 20.613,13.48 21.52,13.48 v1(22.25,12.75)
MA732_MOSI: U1.4 U2.3 | length 14.5
  Top Layer w0.2: v1(18.5,21.219) 18.5,18.404 20.679,16.225 21.321,16.225 22.346,17.25 U1.4
  Bottom Layer w0.2: U2.3 16.52,18.92 16.52,19.432 18.202,21.113 18.395,21.113 v1(18.5,21.219)
MA732_SCLK: U1.12 U3.5 | length 32
  Top Layer w0.2: v1(8,26) 9,25 v1(11,25) ; v1(14.5,26.5) 16,25 v1(18.75,25) ; U1.12 28.68,18.75 28.707,18.777 v1(28.707,19.523) v1@28.602,19.418
  Bottom Layer w0.2: U3.5 7.325,22.345 7,22.67 7,25 v1(8,26) ; v1(11,25) 12.5,26.5 v1(14.5,26.5) ; v1(18.75,25) 23.231,25 v1(28.707,19.523)
MA732_Z: U1.3 U2.15 | length 12.6
  Top Layer w0.2: v1(15.184,15.705) 15.289,15.81 15.847,15.81 15.882,15.845 18.695,15.845 18.9,15.64 v1(20.171,15.64) ; v1(21,17) 21.149,17 21.399,17.25 21.538,17.25 22.038,17.75 U1.3
  Bottom Layer w0.2: v1(15.184,15.705) 15.236,15.653 15.98,15.653 16,15.633 U2.15 ; v1(20.171,15.64) 20.276,15.745 20.276,16.276 v1(21,17)
NetD1_1: D1.1 R6.1 | length 2.6
  Bottom Layer w0.3: D1.1 R6.1
NetD2_1: D2.1 R7.1 | length 2.6
  Bottom Layer w0.3: D2.1 R7.1
NetD3_1: D3.1 R8.1 | length 2.6
  Bottom Layer w0.3: D3.1 R8.1
NetR1_1: R1.1 R2.2 U2.6 | length 11
  Top Layer w0.2: R1.1 R1.1@17.25,20.125 ; R2.2 17.494,21.994 19.608,21.994 19.851,21.75 v1(20,21.75)
  Top Layer w0.4: R1.1 R2.2
  Bottom Layer w0.2: U2.6 18,19.08 18.02,19.1 18.02,19.235 18.285,19.5 18.747,19.5 19.397,18.85 19.502,18.85 19.514,18.838 20.05,18.838 20.597,19.384 20.597,21.153 v1(20,21.75)
NetU2_5: U2.5 U2.12 | length 21.5
  Top Layer w0.2: v1(17.75,13.87) 17.855,13.765 18.386,13.765 18.486,13.665 23.415,13.665 v1(24.25,14.5) ; v1(19.729,19.613) 19.743,19.6 21.044,19.6 21.419,19.225 22.975,19.225 v1(23.5,19.75)
  Bottom Layer w0.2: U2.12 17.5,14.269 17.75,14.019 v1(17.75,13.87) ; U2.5 17.52,18.92 17.52,19.3 18.12,19.9 19.294,19.9 19.581,19.613 v1(19.729,19.613) ; v1(23.5,19.75) 23.596,19.75 24.25,19.096 v1(24.25,14.5)
SPI/INC: P5.2 U2.4 U2.7 U3.4 U3.12 | length 89.2
  Top Layer w0.2: v1(8.5,11.354) 8.5,13.096 9.929,14.525 v1(11.124,14.525) ; v1(10.968,18.782) 10.968,18.93 11.358,19.321 v1(11.358,21.75) ; v1(13.75,25) 15.206,23.544 20.456,23.544 22.25,21.75 v1(22.25,20) 20.48,20 v1(19.75,20.73) ; v1(33.75,10.25) 44.25,10.25 P5.2
  Bottom Layer w0.2: U3.4 6.675,19.101 6.25,18.676 6.25,18.25 6.26,18.24 6.26,16.99 7.325,15.925 7.325,13.089 8.395,12.019 8.395,11.459 v1(8.5,11.354) ; v1(10.968,18.782) 10.945,18.759 10.945,14.853 11.124,14.674 v1(11.124,14.525) ; v1(11.358,21.75) 11.5,21.75 12.625,22.875 12.625,23.875 v1(13.75,25) ; U2.4 17.02,18.92 17.02,19.366 17.954,20.3 18.677,20.3 19.002,20.625 19.645,20.625 v1(19.75,20.73) ; U2.7 18.52,18.88 18.52,18.567 18.637,18.45 19.336,18.45 19.348,18.438 20.216,18.438 20.6,18.822 21.242,18.822 23.25,16.814 23.25,11.367 24.867,9.75 33.25,9.75 v1(33.75,10.25) ; 21.225,18.822 21.225,18.975 v1(22.25,20)
Z/MOSI_N: P1.9 P3.9 R4.1 U2.1 U2.13 | length 43.1
  Top Layer w0.33: v1(13.75,13.25) 13.83,13.33 14.451,13.33 14.681,13.56 16.327,13.56 16.636,13.87 v1(16.7,13.87)
  Bottom Layer w0.33: v1(13.75,13.25) 14.329,13.829 14.329,14.455 13.79,14.993 13.79,18.522 13.66,18.652 13.66,19.348 ; R4.1@14.05,23.175 14.735,22.49 14.735,21.76 14.565,21.59 14.208,21.59 14.09,21.472 14.09,21.436 13.66,21.006 13.66,19.348 ; R4.1@14.05,23.25 14.05,23.325 14.735,24.01 14.735,24.74 16.726,26.731 19.01,26.731 20.755,28.477 20.755,29.373 21.837,30.455 21.837,31.277 P3.9 ; U2.1 15.35,19.367 15.095,19.622 15.066,19.622 14.848,19.84 14.152,19.84 13.66,19.348 ; v1(16.7,13.87) 16.75,13.87 v1@16.91,13.71 ; U2.13 17,14.964 16.583,14.547 16.583,14.274 16.62,14.237 16.62,14.064 16.776,13.908 16.788,13.908 16.7,13.82 16.7,12.97 21.285,8.385 21.285,7.034 22.049,6.27 P1.9@22.08,6.27
Z/MOSI_P: P1.10 P3.10 R4.2 U2.2 U2.14 | length 38.9
  Top Layer w0.33: v1(14.5,19) 14.519,19.019 14.519,20.677 v1(14.539,20.697)
  Bottom Layer w0.33: v1(14.5,19) 14.5,18.886 14.32,18.707 14.32,15.213 14.859,14.674 14.859,14.193 15.052,14 15.86,14 ; v1(14.539,20.697) 15.449,20.697 15.625,20.873 ; U2.2 16,19.75 15.625,20.125 15.625,20.873 ; U2.14@16.485,15.585 16.485,15.178 15.86,14.553 15.86,14 ; U2.14@16.485,15.585 U2.14@16.485,15.6 ; P1.10@22.08,3.73 20.755,5.055 20.755,7.252 15.86,12.147 15.86,14 ; P3.10 22.008,28.98 19.229,26.201 16.946,26.201 15.265,24.52 15.265,24.01 15.95,23.325 15.95,23.175 15.265,22.49 15.265,21.98 15.625,21.62 15.625,20.873
pads on no net: P1.1 P1.4 P3.1 P3.4 P4.7 P4.8 U1.1 U1.9 U1.14 U1.15 U4.4

## Polygon pours and split planes (outlines as drawn)
GND on Bottom Layer "GND_L02_P001" (solid, pour order 1): 54,36 54,0 0,0 0,36
GND on Top Layer "GND_L01_P000" (solid, pour order 0): 0,0 54,0 54,36 0,36

## Silkscreen, mask and mechanical layers (free items; w line width, h text height)
Top Overlay:
  drawing of 17 lines, arcs and shapes, not listed
Bottom Overlay:
  lines w0.254: 43.25,21 47.25,21 47.25,24.5 43.25,24.5 43.25,21
  text "Output" at 25.124,23.75 h1.5
  text "CS OUT" at 42.749,23.75 h1.5
  text "INC" at 52.624,21.25 h1.5
  text "MGL" at 40.499,18.75 h1.5
  text "MGH" at 40.499,16.5 h1.5
  text "POWER" at 40.499,14.25 h1.5
  text "SPI" at 52.499,10.75 h1.5
  text "Input" at 24.124,10.25 h1.5
  text "CS IN" at 41.624,10 h1.5
Mechanical 1:
  circle w0.254: c3,3 r2
  circle w0.254: c51,3 r2
  circle w0.254: c51,33 r2
  circle w0.254: c3,33 r2
  lines w0.254: 0,0 54,0 54,36 0,36 0,0

## Dimensions
53,3 to 54,0 on Mechanical 1
51,1 to 54,0 on Mechanical 1
51,3 to 47.25,7 on Mechanical 1
0,36 to 0,0 on Mechanical 1
0,36 to 54,36 on Mechanical 1

## Text inside footprints (layer, text, board x,y; h text height)
P1: Bottom Overlay "9" at 23.34,6.74 h1.02 r180; Bottom Overlay "10" at 23.34,4.2 h1.02 r180; Bottom Overlay "2" at 10.06,4.26 h1.02 r180; Bottom Overlay "1" at 10.36,6.8 h1.02 r180
P2: Bottom Overlay "8" at 43.32,4.2 h1.02 r180; Bottom Overlay "7" at 43.32,6.74 h1.02 r180; Bottom Overlay "2" at 32.58,4.26 h1.02 r180; Bottom Overlay "1" at 32.88,6.8 h1.02 r180
P3: Bottom Overlay "9" at 23.34,31.99 h1.02 r180; Bottom Overlay "10" at 23.34,29.45 h1.02 r180; Bottom Overlay "2" at 10.06,29.51 h1.02 r180; Bottom Overlay "1" at 10.36,32.05 h1.02 r180
P4: Bottom Overlay "8" at 43.32,29.45 h1.02 r180; Bottom Overlay "7" at 43.32,31.99 h1.02 r180; Bottom Overlay "2" at 32.58,29.51 h1.02 r180; Bottom Overlay "1" at 32.88,32.05 h1.02 r180
U1: Top Overlay "*" at 24.193,18.115 h1.27; Mechanical 13 "*" at 26.276,18.115 h1.27